# Altium PCB test_In.PcbDoc
Units mm, origin at the board's own origin, x right, y up, seen from the top; angles counter-clockwise.
Board outline 72.77 x 25.53 mm, 2 copper layers (Top Layer, Bottom Layer); 12 components, 7 nets, 27 pads, 0 vias.
Unrouted connection lines stored in the file: 7.
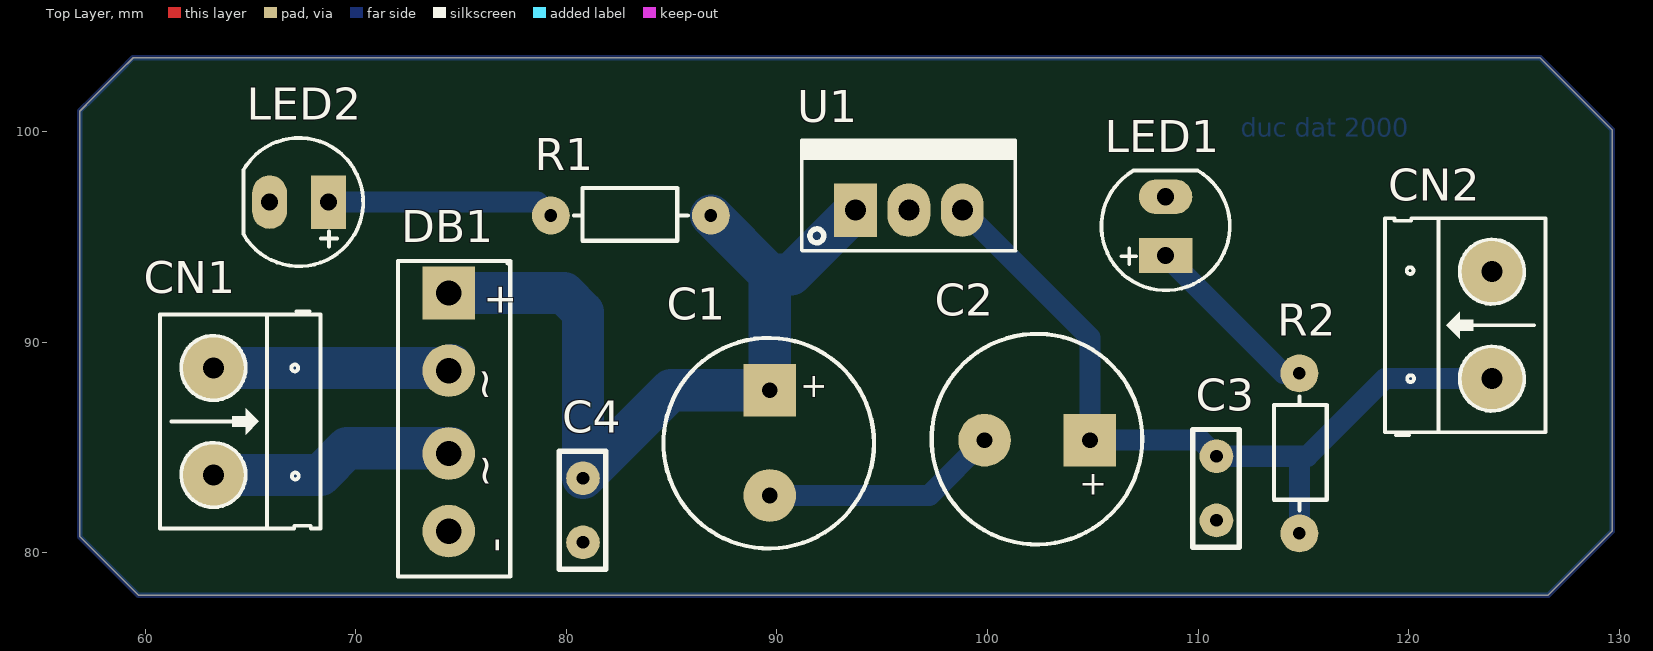
[diagram p0: Top Layer view]
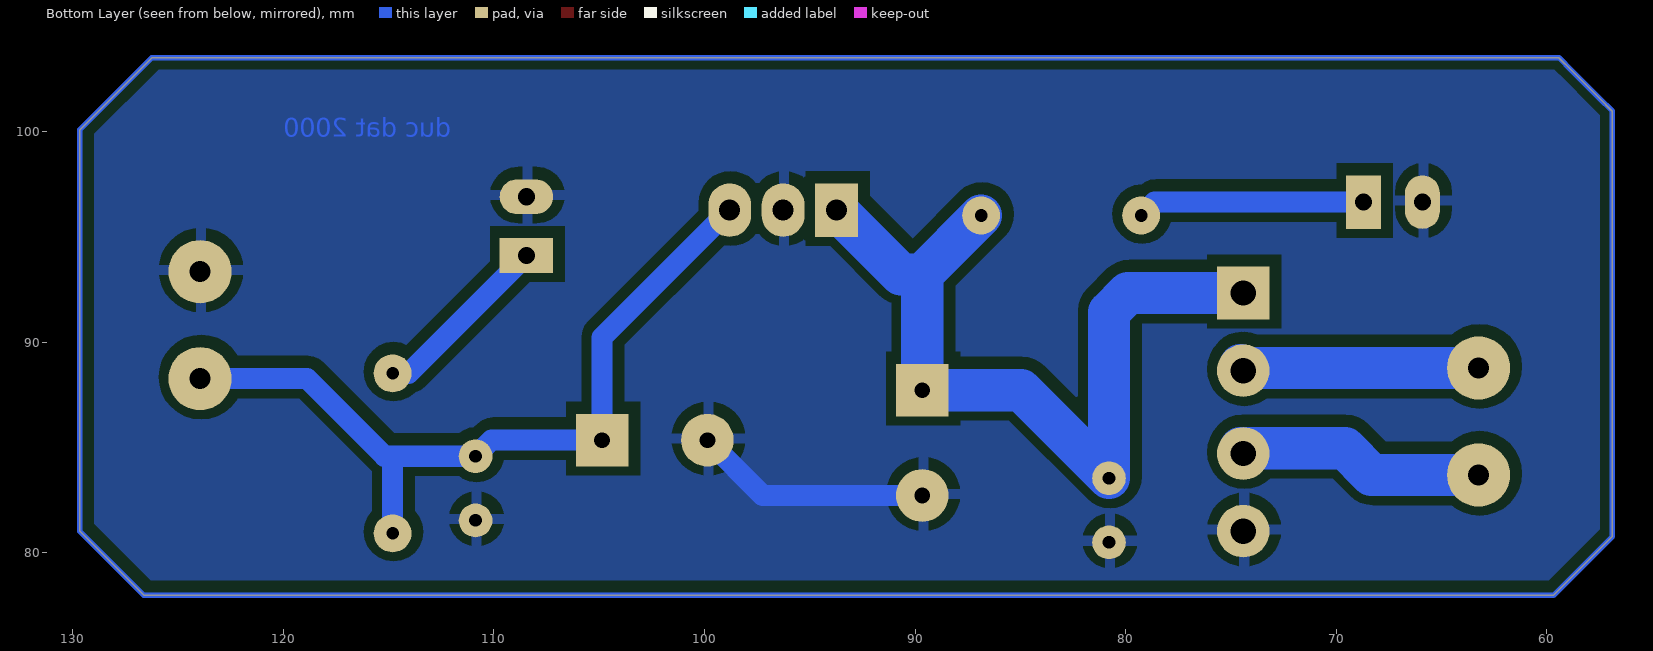
[diagram p1: Bottom Layer view, seen from below]
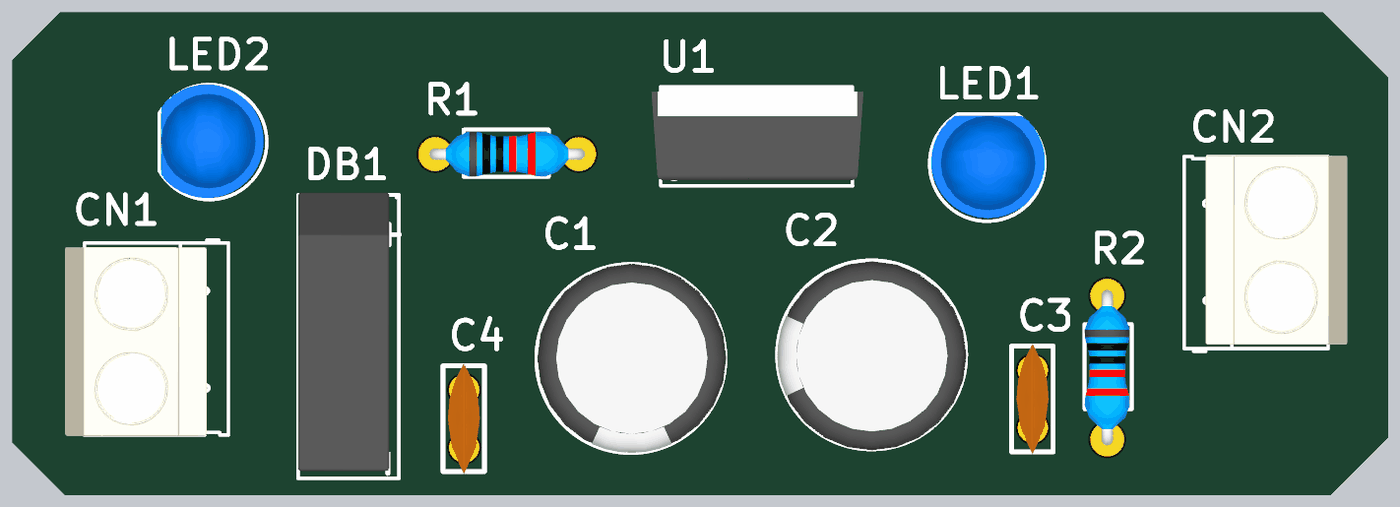
[diagram p2: 3D render of the assembled board from above, using the file's embedded part models]

## Layer stack, top to bottom
Top Solder: solder mask 0.0102, Solder Resist, Dk 3.5
Top Layer: signal copper 0.0356
Dielectric 1: dielectric 0.32, FR-4, Dk 4.8
Bottom Layer: signal copper 0.0356
Bottom Solder: solder mask 0.0102, Solder Resist, Dk 3.5

## Board outline
59.69,77.978 56.896,80.772 56.896,100.965 57.531,101.6 58.801,102.87 59.436,103.505 126.238,103.505 129.667,100.076 129.667,81.026 126.619,77.978

## Design rules (kind name [scope] priority, off if disabled: settings)
Clearance [All] p1: gap=0.5
PolygonConnect [All] p1: connectstyle=Relief reliefconductorwidth=1 reliefentries=4 polygonreliefangle="90 Angle" airgapwidth=0.5
RoutingLayers [All] p1: top layer_v5=FALSE bottom layer_v5=TRUE
RoutingVias [All] p1: holewidth=0.711 width=1.27 viastyle="Through Hole" minholewidth=0.711 minwidth=1.27 maxholewidth=0.711 maxwidth=1.27
SolderMaskExpansion [All] p1: expansion=0.102
Width [All] p1: maxlimit=3 minlimit=0.254 preferedwidth=1
29 further rules are at their usual default settings.

## Components (designator, comment, footprint, x,y, rotation, side; value= is the part's Value field where it differs from the comment)
C1 "1000u" "Cap 10mm" 89.662,85.217 r90 top
C2 "220u" "Cap 10mm" 102.362,85.344 r0 top
C3 "104" "Cap Non Pol 3mm" 110.849,81.56 r90 top
C4 "104" "Cap Non Pol 3mm" 80.772,80.518 r90 top
CN1 "Con2/Header2" "Terminal Block2" 66.573,91.77 r270 top
CN2 "Con2/Header2" "Terminal Block2" 120.625,85.268 r90 top
DB1 "Diode bridge" "DIO-Bri 1A" 74.422,92.329 r270 top
LED1 "LED" "LED-5mm BLUE" 108.458,95.504 r90 top
LED2 "LED" "LED-5mm BLUE" 67.31,96.647 r180 top
R1 "1k" "RESISTOR 1/4W" 79.268,96.012 r0 top
R2 "1k" "RESISTOR 1/4W" 114.808,88.519 r270 top
U1 "7805" QTO-220 93.726,96.266 r0 top

## Footprints (in the part's own frame and the unit in brackets; to place one, negate y for a bottom-side part, rotate by r counter-clockwise, add the part's x,y. Pads: shape width x height; smd on the part's side, far side on the other; paste and mask are expansions set on the pad)
"Cap 10mm" [mm] "Cap d=10mm, pitch=5mm"
  rect 2.5x2.5 hole 0.75: 1(2.5,0)
  round 2.5 hole 0.75: 2(-2.5,0)
  silkscreen extent -5.01,-4.95 4.98,5.05, body extent -5.01,-5 5,5, height 16.31
"Cap Non Pol 3mm" [mm] "d=3mm, pitch=0.1in"
  round 1.6 hole 0.6: 1(-0.026,-0.022) 2(3.022,-0.022)
  silkscreen extent -1.3,-1.1 4.29,1.1, body extent -1.42,-0.85 4.42,0.84, height 6.22
"DIO-Bri 1A" [mm]
  rect 2.5x2.5 / inner round 1.575 / far side rect 2.5x2.5 hole 1.2: 1(0,0)
  round 2.5 hole 1.2: 2(3.683,0) 3(7.62,0) 4(11.303,0)
  silkscreen extent -1.52,-2.41 13.46,2.92, body extent -1.65,-2.41 13.08,2.41, height 0.5
"LED-5mm BLUE" [mil] "LED-5mm BLUE"
  rect 65x100 hole 32: 1(-55,0)
  oval 65x100 hole 32: 2(55,0)
  silkscreen extent -120,-120 104,120, body extent -113,-120 100,117, height 339
QTO-220 [mil] "TO-220 - 1-2-3"
  rect 80x100 hole 39: 1(0,0)
  oval 80x100 hole 39: 2(100,0) 3(200,0)
  silkscreen extent -100,-76 300,130, body extent -119,-64 322,121, height 755
"RESISTOR 1/4W" [mm] "P=0.25W, PITCH = 7.6 mm"
  round 1.8 hole 0.6: 1(0,0) 2(7.6,0)
  silkscreen extent 1.1,-1.2 6.5,1.3, body extent -0.31,-1.2 7.91,1.2, height 2.7
"Terminal Block2" [mm] "Terminal Blcok 2 position,pitch=5mm"
  round 3 hole 1: 1(2.997,-3.327) 2(8.077,-3.327)
  silkscreen extent 0.3,-5.87 10.62,1.75, body extent 0.66,-6.88 10.66,0.62, height 10

## Part data
C1 C2: library part "Cap Pol", "Cap Pol"
C3 C4: library part "Cap Non Pol", "Cap Nol Pol"
CN1 CN2: "CON2"
R1 R2: library part RESISTOR, "RESISTOR"
U1: library part 78xx, "LM78xx, on ap +"

## Nets (pads, with @x,y where several pads share a name; then routed paths per layer and width w, separated by ;. In a path a pad name is that pad's centre, name@x,y a point inside that pad or via, vN(x,y) a via of type N, cw(c..) or ccw(c..) an arc to the next point about the centre after c; other vN are vias at no path point)
NetC1_1: C1.1 C4.2 DB1.1 R1.2 U1.1 | length 40
  Bottom Layer w2: DB1.1 79.883,92.329 80.794,91.418 C4.2 84.971,87.717 C1.1 89.662,93.218 ; R1.2 89.662,93.218 ; U1.1 90.678,93.218 89.662,93.218
NetC1_2: C1.2 C2.2 C3.1 C4.1 CN2.2 DB1.4 LED1.2 LED2.2 U1.2 | length 11.3
  Bottom Layer w1: C1.2 97.235,82.717 C2.2
NetC2_1: C2.1 C3.2 CN2.1 R2.2 U1.3 | length 38.1
  Bottom Layer w1: U1.3 104.862,90.21 C2.1 110.109,85.344 C3.2 114.554,84.582 ; R2.2 114.808,84.328 114.554,84.582 ; CN2.1 118.872,88.265 115.189,84.582 114.554,84.582
NetCN1_1: CN1.1 DB1.3 | length 11
  Bottom Layer w2: CN1.1@63.627,88.773 74.422,88.773 74.549,88.9
NetCN1_2: CN1.2 DB1.2 | length 11.4
  Bottom Layer w2: CN1.2@63.627,83.693 68.326,83.693 69.596,84.963 74.549,84.963
NetLED1_1: LED1.1 R2.1 | length 8.7
  Bottom Layer w1: LED1.1 114.046,88.519 R2.1
NetLED2_1: LED2.1 R1.1 | length 10.8
  Bottom Layer w1: LED2.1 78.633,96.647 R1.1
copper on no net: | length 189.7
  Bottom Layer w0.254: 56.896,80.772 59.69,77.978 126.619,77.978 129.667,81.026 129.667,100.076 126.238,103.505 59.436,103.505 58.801,102.87 57.531,101.6 56.896,100.965 56.896,100.711 56.896,98.298 56.896,80.772

## Polygon pours and split planes (outlines as drawn)
NetC1_2 on Bottom Layer "Bottom Layer-No Net" (solid, pour order 6): 59.767,103.709 57.1,101.042 56.846,101.042 56.846,81.23 59.767,78.309 126.569,78.309 126.696,78.182 129.617,81.103 129.617,99.899 125.934,103.582
NetC1_2 on Bottom Layer "Bottom Layer-No Net" (solid, pour order 10): 80.518,90.932 79.121,92.329 78.232,92.329

## Other copper
Bottom Layer:
  text "duc dat 2000" at 112.014,99.441 h1.52

## Text inside footprints (layer, text, board x,y; h text height)
C1: Top Overlay "+" at 92.662,87.217 h2 r90
C2: Top Overlay "+" at 104.362,82.344 h2
DB1: Top Overlay "-" at 76.2,80.721 h1.43 r270; Top Overlay "+" at 76.263,92.812 h1.43 r270; Top Overlay "~" at 75.552,84.709 h1.43 r270; Top Overlay "~" at 75.54,88.798 h1.43 r270